# Altium PCB PCB_国产飞控 led端子 copy copy.pcbdoc (part 2 of 2)
Units mil, origin at the board's own origin, x right, y up, seen from the top; angles counter-clockwise.
Board outline 3467.18 x 2997.13 mil, 4 copper layers (Top Layer, Inner1, Inner2, Bottom Layer), stack 2.757 mil thick; 107 components, 163 nets, 527 pads, 148 vias.
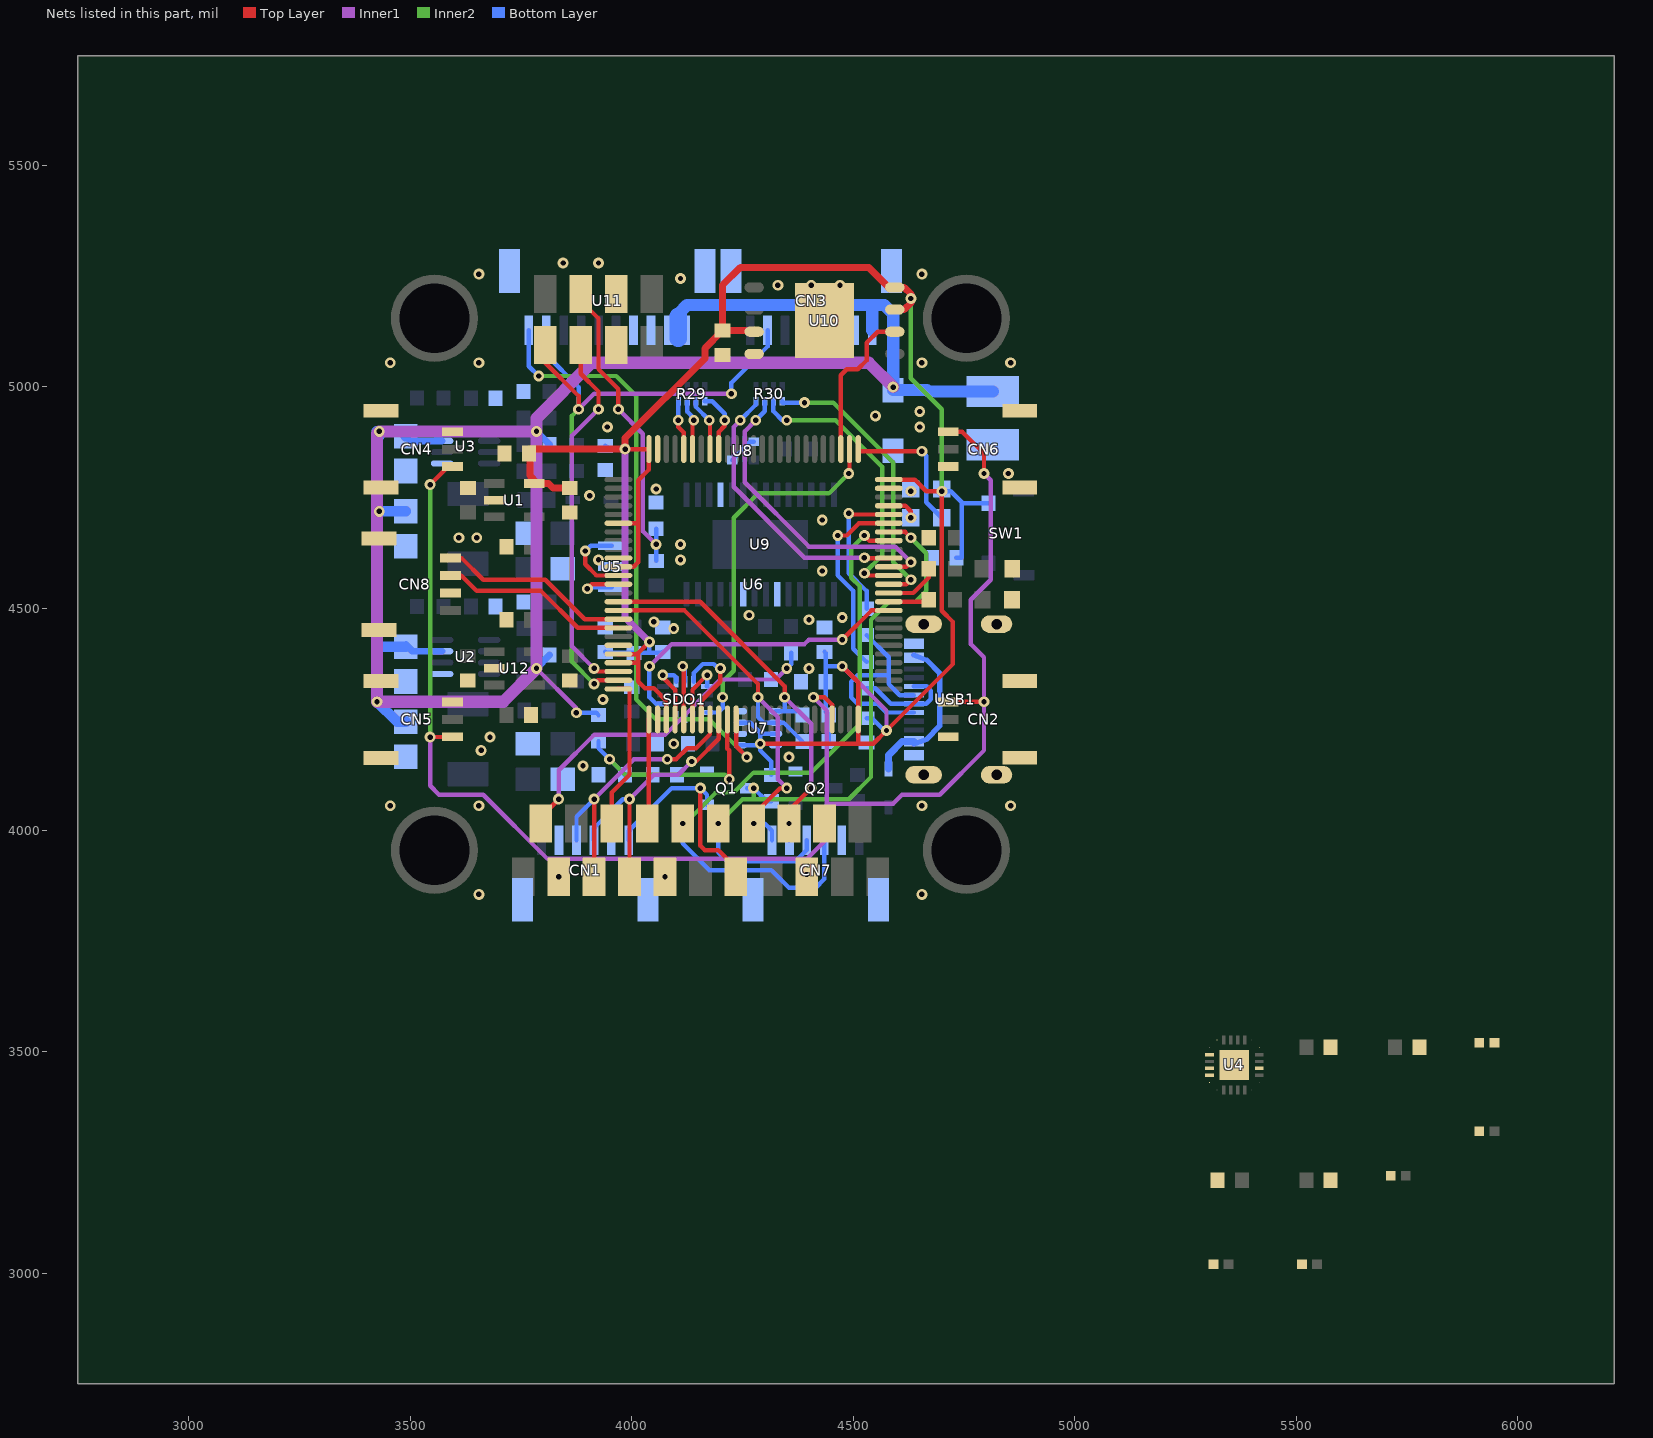
[diagram p4: the nets of this part, all layers, seen from the top]

## Via types
v1: diameter 24.41, hole 12.2, Top Layer to Bottom Layer, 148 vias

## Nets (pads, with @x,y where several pads share a name; then routed paths per layer and width w, separated by ;. In a path a pad name is that pad's centre, name@x,y a point inside that pad or via, vN(x,y) a via of type N, cw(c..) or ccw(c..) an arc to the next point about the centre after c; other vN are vias at no path point) (continued)
BOX_SCK: U6.78 U10.6 | length 352.8
  Top Layer w10: U6.78@4471.9,4859.73 4471.9,5026.53 4485,5039.63 4510,5039.63 4530,5059.63 4530,5099.63 4555,5124.63 U10.6@4593.77,5124.63
C6_1: 
C26_2: 
C27_1: 
C27_2: 
CURRENT1: U6.36 U11.1 | length 1434.8
  Top Layer w10: U6.36@4235.63,4249.52 4235.6,4189.03 v1(4260,4164.63)
  Inner2 w10: v1(3790,5024.63) 3965,5024.63 4010,4979.63 4010,4294.63 4055,4249.63 4175,4249.63 v1(4260,4164.63)
  Bottom Layer w10: U11.1@3767.82,5127.7 3767.8,5046.83 v1(3790,5024.63)
D+: R6.2 U6.71 | length 323
  Top Layer w10: v1(4490,4714.63) 4492.5,4712.13 U6.71@4580.11,4712.11
  Bottom Layer w10: v1(4490,4714.63) 4490,4579.63 4530,4539.63 R6.2@4530,4499.3
D-: R5.2 U6.70 | length 438.8
  Top Layer w10: v1(4465,4664.63) 4485,4664.63 4512.8,4692.43 U6.70@4580.11,4692.43
  Bottom Layer w10: v1(4465,4664.63) 4465,4574.63 4500,4539.63 4500,4409.33 R5.2@4530,4379.3
DN: R5.1 USB1.A7 USB1.B7 | length 225.7
  Bottom Layer w10: R5.1@4530,4319.93 4549.7,4319.93 4584.8,4284.83 USB1.A7@4636.59,4284.79 4664.8,4284.83 4675,4295.03 4675,4314.63 4665.5,4324.13 USB1.B7@4636.6,4324.13
DP: R6.1 USB1.A6 USB1.B6 | length 480
  Bottom Layer w10: R6.1@4530,4439.93 4580,4389.93 4580,4329.63 4605.2,4304.43 USB1.A6@4636.6,4304.43 ; 4580,4349.23 4509.6,4349.23 4495,4334.63 4495,4299.63 4510,4284.63 4555,4284.63 4574.5,4265.13 USB1.B6@4636.59,4265.1
GND: C1.1 C2.1 C3.1 C4.1 C7.1 C8.1 C9.1 C10.1 C11.1 C12.1 C13.1 C14.1 C15.1 C16.1 C17.1 C18.1 C19.1 C20.1 C21.1 C22.1 C23.1 C24.1 C25.1 C28.1 C29.1 C30.1 C31.1 C32.1 C33.1 C35.2 C36.2 C37.2 C38.1 C39.2 CN1.2 CN1.5 CN1.7 CN1.8 CN2.1 CN2.4 CN2.5 CN3.7 CN3.9 CN3.10 CN4.1 CN4.4 CN4.5 CN5.1 CN5.4 CN5.5 CN6.1 CN6.4 CN6.5 CN7.2 CN7.7 CN7.8 CN8.3 CN8.5 CN8.6 D3.2 LED1.2 LED2.2 pad.5@3835,3894.63 pad.5@3965,5094.63 pad.5@3965,5209.63 pad.5@4075,3894.63 pad.5@4435,4014.63 pad.5@4630,4769.63 pad.5@4815,4869.63 Q1.2 Q2.2 R13.1 R14.1 R16.1 R17.2 R20.1 R22.1 R32.1 R33.1 SDO1.6 SDO1.7 U1.2 U2.5 U3.5 U4.18 U4.20 U4.25 U5.2 U6.10 U6.20 U6.27 U6.74 U6.99 U7.1 U7.5 U7.7 U8.2 U8.4 U9.4 U9.20 U9.23 U10.4 U10.9 U11.7 U11.8 U11.11 U11.12 U12.2 USB1.25 USB1.26 USB1.27 USB1.28 USB1.A1 USB1.A12 USB1.B1 USB1.B12 | length 66.4
  Bottom Layer w10: U8.4@4226.38,4834.94 4267.7,4876.33 U8.2@4275.59,4876.28
  other v1: 3655,3854.63 4655,3854.63 3835,3894.63 4075,3894.63 3455,4054.63 3655,4054.63 4655,4054.63 4855,4054.63 3890,4144.63 4355,4164.63 3660,4179.63 4095,4194.63 3680,4209.63 3935,4294.63 4400,4364.63 4095,4454.63 4050,4469.63 4400,4474.63 4475,4479.63 4265,4484.63 4430,4584.63 3925,4609.63 4110,4609.63 4110,4644.63 3610,4659.63 3650,4659.63 4430,4699.63 3905,4754.63 4630,4764.63 4055,4769.63 4850,4804.63 3945,4909.63 4650,4909.63 4550,4934.63 4650,4944.63 3455,5054.63 3655,5054.63 4655,5054.63 4855,5054.63 4330,5229.63 4405,5229.63 4470,5229.63 4110,5244.63 3655,5254.63 4655,5254.63 3845,5279.63 3925,5279.63
GYRO_CS1: R36.1 SDO1.12 U4.22 U6.29 | length 153.9
  Top Layer w10: v1(4070,4349.63) 4070,4344.63 4097.8,4316.83 U6.29@4097.83,4249.52
  Bottom Layer w10: v1(4070,4349.63) 4095,4349.63 4100.3,4344.33 SDO1.12@4100.31,4334.49
GYRO_EXTI1: SDO1.4 U4.12 U6.77 | length 837.6
  Top Layer w10: v1(4490,4804.63) 4491.5,4804.63 U6.77@4491.54,4859.74
  Inner2 w10: v1(4205,4299.63) 4205,4334.63 4230,4359.63 4230,4704.63 4285,4759.63 4445,4759.63 v1(4490,4804.63)
  Bottom Layer w10: SDO1.4@4169.69,4265.1 4195.5,4265.13 4205,4274.63 v1(4205,4299.63)
GYRO_EXTI2: SDO1.9 U6.60 | length 698.7
  Top Layer w10: v1(4475,4429.63) 4540.9,4495.53 U6.60@4580.1,4495.53
  Inner1 w10: v1(4040,4369.63) 4090,4419.63 4390,4419.63 4400,4429.63 v1(4475,4429.63)
  Bottom Layer w10: v1(4040,4369.63) 4040,4299.63 4054.8,4284.83 SDO1.9@4070.32,4284.79
GYRO_MISO: R33.2 SDO1.1 U4.9 U6.31 | length 139.3
  Top Layer w10: U6.31@4137.2,4249.52 4137.2,4316.83 v1(4170,4349.63)
  Bottom Layer w10: SDO1.1@4169.7,4324.13 4170,4324.43 v1(4170,4349.63)
GYRO_MOSI: R34.1 SDO1.14 U4.24 U6.32 | length 225.6
  Top Layer w10: U6.32@4156.89,4249.52 4156.9,4291.53 4200,4334.63 v1(4200,4364.63)
  Bottom Layer w10: SDO1.14@4139.69,4334.49 4139.7,4354.33 4160,4374.63 4185,4374.63 4195,4364.63 v1(4200,4364.63)
GYRO_SCK: R35.1 SDO1.13 U4.23 U6.30 | length 161.2
  Top Layer w10: v1(4115,4369.63) 4117.5,4367.13 U6.30@4117.52,4249.52
  Bottom Layer w10: v1(4115,4369.63) 4120,4369.63 SDO1.13@4120,4334.49
HEXT_IN: U5.3 U6.12 | length 180.4
  Top Layer w10: v1(3895,4629.63) 3895,4599.63 3920.3,4574.33 U6.12@3969.89,4574.31
  Bottom Layer w10: v1(3895,4629.63) 3907.2,4641.83 U5.3@3955,4641.83
HEXT_OUT: U5.1 U6.13 | length 131.8
  Top Layer w10: v1(3900,4544.63) 3910,4554.63 U6.13@3969.89,4554.63
  Bottom Layer w10: v1(3900,4544.63) 3900,4547.43 U5.1@3955,4547.43
I2C_SCL: CN7.5 pad.5@4355,4014.63 R24.1 U6.15 U7.4 | length 945.5
  Top Layer w10: U6.15@3969.9,4515.23 4154.4,4515.23 4345,4324.63 v1(4345,4299.63) ; v1(4355,4014.63) 4355,4044.63 v1(4405,4094.63)
  Inner1 w10: v1(4345,4299.63) 4405,4239.63 v1(4405,4094.63)
  Bottom Layer w10: U7.4@4324.7,4268.02 4377,4268.03 R24.1@4385.34,4259.63 ; v1(4345,4299.63) 4345,4273.03 4350,4268.03 ; v1(4355,4014.63) CN7.5@4355.9,3976.53
I2C_SDA: CN7.6 pad.5@4275,4014.63 R25.1 U6.16 U7.3 | length 1003.7
  Top Layer w10: U6.16@3969.9,4495.53 4119.1,4495.53 4285,4329.63 v1(4285,4299.63) ; v1(4275,4014.63) 4275,4034.63 4335,4094.63 v1(4350,4094.63)
  Inner1 w10: v1(4285,4299.63) 4330,4254.63 4330,4114.63 v1(4350,4094.63)
  Bottom Layer w10: v1(4275,4014.63) 4300,4014.63 4316.6,3998.03 CN7.6@4316.6,3976.53 ; v1(4285,4299.63) 4285,4254.63 4297.2,4242.43 U7.3@4324.7,4242.43 4342.5,4242.43 R25.1@4385.34,4199.63
L1_1: 
LED: CN2.3 CN4.3 CN5.3 CN6.3 pad.5@4395,3894.63 U6.47 | length 3563.7
  Top Layer w10: v1(3545,4209.63) CN5.3@3595.7,4210.23 ; v1(3545,4779.63) 3585.6,4820.23 CN4.3@3595.7,4820.23 ; pad.5@4395,3894.63 v1(4395,3899.63) ; v1(4410,4299.63) 4435,4299.63 4452.2,4282.43 U6.47@4452.17,4249.52 ; CN2.3@4714.29,4289 v1(4795,4289.63) ; CN6.3@4714.29,4899 4745.6,4899.03 4795,4849.63 v1(4795,4804.63)
  Inner1 w10: v1(3545,4209.63) 3545,4099.63 3565,4079.63 3665,4079.63 3810,3934.63 4395,3934.63 ; v1(4410,4299.63) 4440,4269.63 4440,3979.63 4395,3934.63 ; 4440,4059.63 4590,4059.63 4610,4079.63 4695,4079.63 4795,4179.63 v1(4795,4289.63) 4795,4389.63 4765,4419.63 4765,4519.63 4810,4564.63 4810,4789.63 v1(4795,4804.63) ; 4395,3934.63 v1(4395,3899.63) 4395,3934.63
  Inner2 w10: v1(3545,4209.63) v1(3545,4779.63)
LED1: R27.2 U6.61 | length 92
  Top Layer w10: U6.61@4580.1,4515.23 4665.9,4515.23 R27.2@4670.34,4519.63
LED2: R28.2 U6.62 | length 124.4
  Top Layer w10: U6.62@4580.11,4534.94 4635.3,4534.93 4670.3,4569.93 R28.2@4670.34,4589.63
MOTOR1: R29.4 U6.92 | length 142.7
  Top Layer w10: U6.92@4196.26,4859.74 4196.3,4898.33 4210,4912.13 v1(4210,4924.63)
  Bottom Layer w10: R29.4@4164.53,4967.8 4181.8,4967.83 4210,4939.63 v1(4210,4924.63)
MOTOR2: R29.3 U6.93 | length 122.2
  Top Layer w10: v1(4175,4924.63) 4176.6,4924.63 U6.93@4176.57,4859.74
  Bottom Layer w10: R29.3@4144.84,4967.8 4144.8,4954.83 v1(4175,4924.63)
MOTOR3: R29.2 U6.95 | length 117
  Top Layer w10: U6.95@4137.2,4859.74 4137.2,4924.63 v1(4140,4924.63)
  Bottom Layer w10: R29.2@4125.16,4967.8 4125.2,4944.43 4140,4929.63 v1(4140,4924.63)
MOTOR4: R29.1 U6.96 | length 113.5
  Top Layer w10: v1(4105,4924.63) 4105,4909.63 4117.5,4897.13 U6.96@4117.52,4859.74
  Bottom Layer w10: v1(4105,4924.63) 4105,4967.33 R29.1@4105.47,4967.8
OSD_IN_CAM: C34.2 pad.5@3885,5209.63 R22.2 | length 708.1
  Top Layer w10: pad.5@3885,5209.63 3885,5194.63 3925,5154.63 3925,5039.63 3970,4994.63 v1(3970,4949.63)
  Inner1 w10: v1(3970,4949.63) 4025,4894.63 4025,4674.63 v1(4055,4644.63)
  Bottom Layer w10: C34.2@4055,4607.19 v1(4055,4644.63) R22.2@4055,4679.93
OSD_OUT_VTX: pad.5@3795,4014.63 R19.2 | length 785.9
  Top Layer w10: pad.5@3795,4014.63 3795,4029.63 v1(3835,4069.63)
  Inner1 w10: v1(3835,4069.63) 3835,4134.63 3915,4214.63 4075,4214.63 4200,4339.63 4325,4339.63 v1(4350,4364.63)
  Bottom Layer w10: v1(4350,4364.63) 4359.7,4374.33 R19.2@4359.66,4399.63
Q2_1: 
R1_1: 
R1_2: 
R3_1: 
R7_1: 
R7_2: 
R8_1: 
R11_2: 
R12_2: 
R13_2: 
R27_1: 
R28_1: 
R29_5: 
R29_6: 
R29_7: 
R29_8: 
R30_5: 
R30_6: 
R30_7: 
R30_8: 
S$147824: 
S$244950: 
S$244954: 
S$288220: 
S$288224: 
S$288228: 
S$288280: 
S$288284: 
S$288288: 
S$288292: 
SBUS: CN1.1 pad.5@4235,3894.63 Q1.1 | length 517.4
  Top Layer w10: v1(4155,4094.63) 4155,3964.63 4165,3954.63 4195,3954.63 4235,3914.63 pad.5@4235,3894.63
  Bottom Layer w10: CN1.1@3993.4,3976.53 3993.4,3998.03 4090,4094.63 v1(4155,4094.63) 4169.8,4079.83 Q1.1@4169.8,4057.23
SERVO1: R30.4 U6.63 | length 645.2
  Top Layer w10: U6.63@4580.11,4554.63 4620,4554.63 v1(4630,4564.63)
  Inner2 w10: v1(4390,4964.63) 4455,4964.63 4590,4829.63 4590,4604.63 v1(4630,4564.63)
  Bottom Layer w10: R30.4@4339.53,4967.8 4339.5,4964.63 v1(4390,4964.63)
SERVO2: R30.3 U6.64 | length 633.9
  Top Layer w10: v1(4525,4579.63) 4530.3,4574.33 U6.64@4580.11,4574.31
  Inner2 w10: v1(4350,4924.63) 4460,4924.63 4565,4819.63 4565,4619.63 v1(4525,4579.63)
  Bottom Layer w10: R30.3@4319.84,4967.8 4319.8,4944.83 4340,4924.63 v1(4350,4924.63)
SERVO3: R30.2 U6.65 | length 705.8
  Top Layer w10: U6.65@4580.11,4594 4619.4,4594.03 v1(4630,4604.63)
  Inner1 w10: v1(4280,4924.63) 4255,4899.63 4255,4784.63 4400,4639.63 4595,4639.63 v1(4630,4604.63)
  Bottom Layer w10: v1(4280,4924.63) 4300.2,4944.83 R30.2@4300.16,4967.8
SERVO4: R30.1 U6.66 | length 630.9
  Top Layer w10: v1(4525,4614.63) 4525.9,4613.73 U6.66@4580.11,4613.69
  Inner1 w10: v1(4245,4924.63) 4230,4909.63 4230,4774.63 4390,4614.63 v1(4525,4614.63)
  Bottom Layer w10: v1(4245,4924.63) 4280.5,4960.13 R30.1@4280.47,4967.8
SWDCLK: pad.5@4700,4704.63 U6.76 | length 317.5
  Top Layer w10: U6.76@4511.22,4859.74 4511.2,4854.63 v1(4655,4854.63)
  Bottom Layer w10: v1(4655,4854.63) 4665,4844.63 4665,4739.63 pad.5@4700,4704.63
SWDIO: pad.5@4630,4704.63 U6.72 | length 70
  Top Layer w10: U6.72@4580.11,4731.8 4617.8,4731.83 4630,4719.63 v1(4630,4704.63)
U3_1: 
U3_2: 
U3_3: 
U3_4: 
U3_6: 
U3_8: 
U6_14: 
U6_37: 
U9_5: 
U9_6: 
U9_19: 
U9_22: 
UART1_RX: CN7.4 pad.5@4195,4014.63 Q1.3 R26.1 U6.69 | length 1483
  Top Layer w10: U6.69@4580.11,4672.74 4616.9,4672.73 v1(4630,4659.63)
  Inner2 w10: v1(4195,4014.63) 4250,4069.63 4490,4069.63 4540,4119.63 4540,4474.63 4580,4514.63 4640,4514.63 4665,4539.63 4665,4624.63 v1(4630,4659.63) ; 4275,4069.63 v1(4275,4094.63)
  Bottom Layer w10: v1(4195,4014.63) 4195,3949.63 4215,3929.63 4370,3929.63 4395.3,3954.93 CN7.4@4395.3,3976.53 ; Q1.3@4260.2,4094.63 v1(4275,4094.63) 4304.7,4064.93 R26.1@4315,4064.93
UART1_TX: CN7.3 pad.5@4115,4014.63 U6.68 | length 1500.3
  Top Layer w10: v1(4525,4664.63) 4536.6,4653.03 U6.68@4580.1,4653.03
  Inner2 w10: v1(4115,4014.63) 4120,4014.63 4190,4084.63 4230,4084.63 4275,4129.63 4405,4129.63 4515,4239.63 4515,4549.63 4495,4569.63 4495,4634.63 v1(4525,4664.63)
  Bottom Layer w10: v1(4115,4014.63) 4115,3969.63 4175,3909.63 4315,3909.63 4355,3869.63 4415,3869.63 4434.7,3889.33 CN7.3@4434.7,3976.53
UART2_RX: pad.5@4035,4014.63 U6.26 | length 238.7
  Top Layer w10: pad.5@4035,4014.63 4038.8,4014.63 U6.26@4038.78,4249.52
UART2_TX: pad.5@3955,4014.63 U6.25 | length 345.5
  Top Layer w10: pad.5@3955,4014.63 3955,4084.63 3995,4124.63 3995,4318.43 U6.25@3969.89,4318.41
UART3_RX: CN1.3 pad.5@3995,3894.63 U6.34 | length 611.5
  Top Layer w10: pad.5@3995,3894.63 3995,3954.63 v1(3995,4069.63) ; v1(4135,4154.63) 4145,4154.63 4196.3,4205.93 U6.34@4196.26,4249.52
  Inner1 w10: v1(3995,4069.63) 4050,4124.63 4105,4124.63 v1(4135,4154.63)
  Bottom Layer w10: CN1.3@3914.7,3976.53 3914.7,4004.33 3980,4069.63 v1(3995,4069.63)
UART3_TX: CN1.4 pad.5@3915,3894.63 U6.33 | length 640.2
  Top Layer w10: pad.5@3915,3894.63 3915,3959.63 v1(3915,4069.63) ; v1(4080,4159.63) 4100,4159.63 4125,4184.63 4145,4184.63 4176.6,4216.23 U6.33@4176.57,4249.52
  Inner1 w10: v1(3915,4069.63) 4005,4159.63 v1(4080,4159.63)
  Bottom Layer w10: CN1.4@3875.3,3976.53 3875.3,4029.93 v1(3915,4069.63)
UART4_RX: CN3.2 pad.5@3805,5094.63 U6.24 U11.2 | length 1626.1
  Top Layer w10: pad.5@3805,5094.63 3805,5054.63 3880,4979.63 v1(3880,4949.63) ; v1(3915,4329.63) 3923.5,4338.13 U6.24@3969.89,4338.09
  Inner1 w10: v1(3880,4949.63) 3915,4984.63 v1(4225,4984.63)
  Inner2 w10: v1(3880,4949.63) 3865,4934.63 3865,4379.63 v1(3915,4329.63)
  Bottom Layer w10: U11.2@3807.19,5127.7 3807.2,5072.43 3880,4999.63 v1(3880,4949.63) ; v1(4225,4984.63) 4225,5009.63 4306.6,5091.23 CN3.2@4306.59,5127.7
UART4_TX: pad.5@3885,5094.63 U6.23 | length 849.9
  Top Layer w10: pad.5@3885,5094.63 3885,5029.63 3925,4989.63 v1(3925,4949.63) ; v1(3915,4364.63) 3921.9,4357.73 U6.23@3969.9,4357.73
  Inner1 w10: v1(3915,4364.63) 3865,4414.63 3865,4889.63 v1(3925,4949.63)
UART8_RX: CN8.2 U6.18 | length 428.1
  Top Layer w10: CN8.2@3590.71,4574.32 3615.3,4574.33 3650,4539.63 3795,4539.63 3878,4456.63 U6.18@3970,4456.63
UART8_TX: CN8.1 U6.17 | length 436.3
  Top Layer w10: CN8.1@3590.71,4613.69 3615.9,4613.73 3665,4564.63 3805,4564.63 3893.7,4475.93 U6.17@3969.89,4475.89
VBAT: C7.2 C8.2 C12.2 C13.2 CN3.8 D3.1 pad.5@4815,4989.63 R3.2 R4.2 R15.2 U2.7 U3.7 U11.9 U11.10 | length 5190.9
  Inner1 w10: v1(3785,4364.63) 3875,4274.63 v1(3875,4264.63)
  Inner1 w27.56: v1(4590,4999.63) 4535,5054.63 3909,5054.63 3784.8,4929.13 v1(3785,4899.63) ; v1(3785,4899.63) v1(3430,4899.63) 3425,4894.63 v1(3425,4289.63) 3710,4289.63 v1(3785,4364.63) v1(3785,4899.63)
  Bottom Layer w10: v1(3875,4264.63) 3919.7,4264.63 R15.2@3925,4259.3
  Bottom Layer w15.75: C7.2@3490,4419.03 3505.6,4403.43 U2.7@3572,4403.43 ; C12.2@3490,4889 3500.6,4878.43 U3.7@3572,4878.43 ; v1(3785,4364.63) R3.2@3814.66,4394.63 ; v1(3785,4899.63) R4.2@3814.66,4869.63
  Bottom Layer w23.62: v1(3430,4719.03) C13.2@3490,4719 ; v1@3430,4889.03 v1(3430,4899.63) ; 3435,4414.03 C7.2@3490,4414 ; C8.2@3490,4244 3470.6,4244.03 v1(3425,4289.63) 3425,4899.63 3490,4899.63 C12.2@3490,4889
  Bottom Layer w27.56: 4105,5127.73 4105,5164.63 4125,5184.63 4542.8,5184.63 ; CN3.8@4542.81,5127.7 4542.8,5184.63 ; pad.5@4815,4989.63 4670,4989.63 4666.7,4992.93 D3.1@4589.99,4992.94 4590,5164.63 4570,5184.63 4542.8,5184.63
  Bottom Layer w39.37: 4105,5109.32 4105,5159.94
VBAT_ADC: C22.2 R15.1 R16.2 U6.35 | length 594.9
  Top Layer w10: U6.35@4215.94,4249.52 4215.9,4183.73 4220,4179.63 v1(4220,4114.63)
  Inner2 w10: v1(3950,4159.63) 3985,4124.63 4210,4124.63 v1(4220,4114.63)
  Bottom Layer w10: R15.1@3925,4199.93 3925,4184.33 R16.2@3984.66,4124.63 C22.2@4047.45,4124.63 ; v1(3950,4159.63) 3950,4159.33 v1@3954.7,4154.63
VBUS: D1.1 USB1.A4 USB1.A9 USB1.B4 USB1.B9 | length 366
  Bottom Layer w11.81: USB1.A9@4636.59,4194.24 4665,4204.63 4695,4234.63 4695,4354.63 4666.4,4383.23 USB1.A4@4636.59,4395.02
  Bottom Layer w15.75: D1.1@4580,4137.84 4580,4169.63 4610,4199.63 USB1.A9@4636.6,4199.63
VDD: C19.2 C20.2 C25.2 C28.2 C29.2 C30.2 C31.2 C32.2 C33.2 C35.1 pad.5@4700,4769.63 R18.2 R24.2 R25.2 R26.2 SW1.2 U1.5 U6.6 U6.11 U6.21 U6.22 U6.28 U6.50 U6.75 U6.100 U7.2 U7.6 U7.8 U10.3 U10.7 U10.8 | length 5516.6
  Top Layer w10: U6.22@3969.9,4377.43 4015,4377.43 ; U6.21@3969.9,4397.13 4012.5,4397.13 v1(4040,4424.63) ; U6.11@3969.89,4594 4004.4,4594.03 4015,4604.63 4015,4692.43 4015,4789.63 4038.8,4813.43 U6.100@4038.78,4859.74 3985.1,4859.73 v1(3985,4859.63) ; 4015,4399.63 4015,4377.43 ; U6.28@4078.1,4249.53 4078.1,4291.53 4050,4319.63 4030,4319.63 4015,4334.63 4015,4377.43 ; v1(4290,4194.63) 4545,4194.63 v1(4575,4224.63) 4725,4374.63 4725,4469.63 4700,4494.63 v1(4700,4764.63) 4665,4764.63 4638.8,4790.83 U6.75@4580.11,4790.85 ; v1(4475,4369.63) 4511.2,4333.43 U6.50@4511.22,4249.52 4511.2,4199.63
  Top Layer w10.08: U6.6@3969.89,4692.43 4015,4692.43
  Top Layer w15.75: C19.2@3767.86,4849.63 3767.9,4859.63 v1(3985,4859.63) 3985,4884.63 4165,5064.63 4165,5087.23 C35.1@4205,5127.19 ; C19.2@3770,4849.63 3770,4799.63 3787.6,4782.03 3796.2,4782.03 3812.6,4782.03 3822.4,4772.23 C20.2@3850,4772.23 ; U10.3@4276.23,5124.63 4273.6,5127.23 C35.1@4205,5127.19 ; U10.7@4593.77,5174.63 4615,5174.63 4630,5189.63 v1(4630,5199.63) 4630,5209.63 4615,5224.63 U10.8@4593.77,5224.63 4580,5224.63 4535,5269.63 4245,5269.63 4205,5229.63 C35.1@4205,5127.19
  Inner1 w10: v1(4475,4369.63) 4575,4269.63 v1(4575,4224.63)
  Inner1 w15.75: v1(3985,4859.63) 3985,4479.63 v1(4040,4424.63)
  Inner2 w10: v1(4630,5199.63) 4630,5019.63 4700,4949.63 v1(4700,4764.63)
  Bottom Layer w10: C30.2@3940,4402.03 3942.1,4399.93 4005,4399.93 4067.9,4399.93 C32.2@4070,4402.03 ; C28.2@3940,4867.19 3947.6,4859.63 v1(3985,4859.63) ; 4040,4399.97 v1(4040,4424.63) ; U7.8@4245.29,4191.24 4286.6,4191.23 v1(4290,4194.63) ; U7.6@4245.29,4242.43 4267.2,4242.43 4290,4219.63 v1(4290,4194.63) ; 4290,4216.83 U7.2@4324.7,4216.84 ; R26.2@4315,4124.3 4315,4154.63 4290,4179.63 v1(4290,4194.63) ; C29.2@4435,4402.03 4437.6,4399.53 4437.6,4369.73 ; R25.2@4444.66,4199.63 R24.2@4444.66,4259.63 4437.6,4266.73 C31.2@4437.56,4334.63 4437.6,4369.73 ; v1(4475,4369.63) 4437.7,4369.63 4437.6,4369.73 ; C25.2@4530,4252.19 4542.4,4252.23 4570,4224.63 v1(4575,4224.63) ; pad.5@4700,4769.63 v1(4700,4764.63) ; C33.2@4732.56,4614.63 4745,4614.63 4745,4739.63 ; SW1.2@4805.11,4737.81 4746.8,4737.83 4745,4739.63 ; v1(4700,4764.63) 4720,4764.63 ; v1(4700,4764.63) 4720,4764.63 ; 4720,4764.63 4745,4739.63
pads on no net: CN3.1 SDO1.2 SDO1.3 SDO1.10 SDO1.11 SW1.3 SW1.4 U1.4 U6.1 U6.2 U6.3 U6.4 U6.5 U6.7 U6.8 U6.9 U6.19 U6.38 U6.39 U6.40 U6.41 U6.42 U6.43 U6.44 U6.45 U6.46 U6.49 U6.51 U6.52 U6.53 U6.54 U6.55 U6.56 U6.57 U6.58 U6.59 U6.67 U6.73 U6.81 U6.83 U6.88 U6.89 U6.90 U6.91 U6.97 U6.98 U9.1 U9.2 U9.7 U9.12 U9.13 U9.14 U9.15 U9.16 U9.17 U9.18 U9.27 U9.28 U9.29 U12.4 USB1.A5 USB1.A8 USB1.B5 USB1.B8

## Polygon pours and split planes (outlines as drawn)
GND on Bottom Layer "Bottom Layer-GND" (solid, pour order 14): 3007.5,5482.13 3007.5,3587.13 3032.5,3562.13 5152.5,3562.13 5152.5,5462.13 5132.5,5482.13 5267.5,5482.13 5282.5,5497.13
GND on Inner2 "Inner2-GND" (solid, pour order 15): 3025,5469.63 3025,3559.63 3020,3554.63 5150,3554.63 5150,5434.63 5095,5489.63
GND on Inner1 "Inner1-GND" (solid, pour order 16): 3000,5492.13 3000,3597.13 3040,3557.13 5085,3557.13 5145,3617.13 5145,5467.13 5150,5472.13
GND on Top Layer "Top Layer-GND" (solid, pour order 4): 3030,5457.13 3030,3557.13 3040,3547.13 5110,3547.13 5130,3567.13 5130,5447.13 5125,5452.13

## Keep-outs
Board Outline Layer:
  region: 3534.12,5133.75 3334.12,5333.75 3331.4,5336.51 3327.57,5343.23 3325.6,5350.72 3325.62,5358.46 3327.64,5365.93 3331.52,5372.64 3336.99,5378.11 3343.7,5381.99 3351.17,5384.01 3358.91,5384.03 3366.4,5382.06 3373.12,5378.23 3375.88,5375.51 3575.88,5175.51 3578.6,5172.75 3582.43,5166.03 3584.4,5158.54 3584.38,5150.8 3582.36,5143.33 3578.48,5136.62 3573.01,5131.15 3566.3,5127.27 3558.83,5125.25 3551.09,5125.23 3543.6,5127.2 3536.88,5131.03 3534.12,5133.75
  region: 3534.12,5133.75 3334.12,5333.75 3331.4,5336.51 3327.57,5343.23 3325.6,5350.72 3325.62,5358.46 3327.64,5365.93 3331.52,5372.64 3336.99,5378.11 3343.7,5381.99 3351.17,5384.01 3358.91,5384.03 3366.4,5382.06 3373.12,5378.23 3375.88,5375.51 3575.88,5175.51 3578.6,5172.75 3582.43,5166.03 3584.4,5158.54 3584.38,5150.8 3582.36,5143.33 3578.48,5136.62 3573.01,5131.15 3566.3,5127.27 3558.83,5125.25 3551.09,5125.23 3543.6,5127.2 3536.88,5131.03 3534.12,5133.75
  region: 4734.12,5175.51 4934.12,5375.51 4936.88,5378.23 4943.6,5382.06 4951.09,5384.03 4958.83,5384.01 4966.3,5381.99 4973.01,5378.11 4978.48,5372.64 4982.36,5365.93 4984.38,5358.46 4984.4,5350.72 4982.43,5343.23 4978.6,5336.51 4975.88,5333.75 4775.88,5133.75 4773.12,5131.03 4766.4,5127.2 4758.91,5125.23 4751.17,5125.25 4743.7,5127.27 4736.99,5131.15 4731.52,5136.62 4727.64,5143.33 4725.62,5150.8 4725.6,5158.54 4727.57,5166.03 4731.4,5172.75 4734.12,5175.51
  region: 4734.12,5175.51 4934.12,5375.51 4936.88,5378.23 4943.6,5382.06 4951.09,5384.03 4958.83,5384.01 4966.3,5381.99 4973.01,5378.11 4978.48,5372.64 4982.36,5365.93 4984.38,5358.46 4984.4,5350.72 4982.43,5343.23 4978.6,5336.51 4975.88,5333.75 4775.88,5133.75 4773.12,5131.03 4766.4,5127.2 4758.91,5125.23 4751.17,5125.25 4743.7,5127.27 4736.99,5131.15 4731.52,5136.62 4727.64,5143.33 4725.62,5150.8 4725.6,5158.54 4727.57,5166.03 4731.4,5172.75 4734.12,5175.51
  region: 4775.88,3975.51 4970.88,3780.51 4973.6,3777.75 4977.43,3771.03 4979.4,3763.54 4979.38,3755.8 4977.36,3748.33 4973.48,3741.62 4968.01,3736.15 4961.3,3732.27 4953.83,3730.25 4946.09,3730.23 4938.6,3732.2 4931.88,3736.03 4929.12,3738.75 4734.12,3933.75 4731.4,3936.51 4727.57,3943.23 4725.6,3950.72 4725.62,3958.46 4727.64,3965.93 4731.52,3972.64 4736.99,3978.11 4743.7,3981.99 4751.17,3984.01 4758.91,3984.03 4766.4,3982.06 4773.12,3978.23 4775.88,3975.51
  region: 4775.88,3975.51 4970.88,3780.51 4973.6,3777.75 4977.43,3771.03 4979.4,3763.54 4979.38,3755.8 4977.36,3748.33 4973.48,3741.62 4968.01,3736.15 4961.3,3732.27 4953.83,3730.25 4946.09,3730.23 4938.6,3732.2 4931.88,3736.03 4929.12,3738.75 4734.12,3933.75 4731.4,3936.51 4727.57,3943.23 4725.6,3950.72 4725.62,3958.46 4727.64,3965.93 4731.52,3972.64 4736.99,3978.11 4743.7,3981.99 4751.17,3984.01 4758.91,3984.03 4766.4,3982.06 4773.12,3978.23 4775.88,3975.51
  region: 3575.88,3933.75 3380.88,3738.75 3378.12,3736.03 3371.4,3732.2 3363.91,3730.23 3356.17,3730.25 3348.7,3732.27 3341.99,3736.15 3336.52,3741.62 3332.64,3748.33 3330.62,3755.8 3330.6,3763.54 3332.57,3771.03 3336.4,3777.75 3339.12,3780.51 3534.12,3975.51 3536.88,3978.23 3543.6,3982.06 3551.09,3984.03 3558.83,3984.01 3566.3,3981.99 3573.01,3978.11 3578.48,3972.64 3582.36,3965.93 3584.38,3958.46 3584.4,3950.72 3582.43,3943.23 3578.6,3936.51 3575.88,3933.75
  region: 3575.88,3933.75 3380.88,3738.75 3378.12,3736.03 3371.4,3732.2 3363.91,3730.23 3356.17,3730.25 3348.7,3732.27 3341.99,3736.15 3336.52,3741.62 3332.64,3748.33 3330.62,3755.8 3330.6,3763.54 3332.57,3771.03 3336.4,3777.75 3339.12,3780.51 3534.12,3975.51 3536.88,3978.23 3543.6,3982.06 3551.09,3984.03 3558.83,3984.01 3566.3,3981.99 3573.01,3978.11 3578.48,3972.64 3582.36,3965.93 3584.38,3958.46 3584.4,3950.72 3582.43,3943.23 3578.6,3936.51 3575.88,3933.75
  lines w0.1: 3334.12,5333.75 cw(c3355.14,5354.49) 3375.88,5375.51 3575.88,5175.51 cw(c3554.86,5154.77) 3534.12,5133.75 3334.12,5333.75 ; 3339.12,3780.51 ccw(c3360.14,3759.77) 3380.88,3738.75 3575.88,3933.75 ccw(c3554.86,3954.49) 3534.12,3975.51 3339.12,3780.51 ; 4734.12,3933.75 cw(c4755.14,3954.49) 4775.88,3975.51 4970.88,3780.51 cw(c4949.86,3759.77) 4929.12,3738.75 4734.12,3933.75 ; 4734.12,5175.51 ccw(c4755.14,5154.77) 4775.88,5133.75 4975.88,5333.75 ccw(c4954.86,5354.49) 4934.12,5375.51 4734.12,5175.51
  lines w10: 3397.13,3954.24 ccw(c3554.61,3954.24) 3554.61,3796.76 4755.39,3796.76 ccw(c4755.39,3954.24) 4912.87,3954.24 4912.87,5155.02 ccw(c4755.39,5155.02) 4755.39,5312.5 3554.61,5312.5 ccw(c3554.61,5155.02) 3397.13,5155.02 3397.13,3954.24

## Silkscreen, mask and mechanical layers (free items; w line width, h text height)
Top Silkscreen Layer:
  drawing of 33 lines, arcs and shapes, not listed
  text "10V" at 3835,5029.63 h26.77 r180
  text "CAM" at 3925,5029.63 h26.77 r180
  text "GND" at 4005,5029.63 h26.77 r180
  text "5V" at 4065,5029.63 h26.77 r180
  text "R4" at 3825,4979.63 h26.77 r180
  text "T4" at 3910,4979.63 h26.77 r180
  text "GND" at 4005,4979.63 h26.77 r180
  text "5V" at 4065,4979.63 h26.77 r180
  text "SHEEPFINDER" at 4160,4969.63 h59.05
  text "G 5 L" at 3640,4924.63 h26.77 r270
  text "V1.1   2024.1" at 4225,4904.63 h59.05
  text "G 5 L" at 4670,4804.63 h26.77 r90
  text "MCU" at 3730.31,4784.63 h26.77 r270
  text "BOOT" at 4730,4699.63 h31.5
  text "AT32F435" at 4080,4679.63 h78.74
  text "T" at 3630,4624.63 h26.77 r270
  text "U" at 3660,4609.63 h26.77 r270
  text "A" at 3660,4589.63 h26.77 r270
  text "R" at 3629.61,4585.02 h26.77 r270
  text "R" at 3660,4564.63 h26.77 r270
  text "G" at 3629.22,4545.41 h26.77 r270
  text "T" at 3660,4544.63 h26.77 r270
  text "8" at 3660,4524.63 h26.77 r270
  text "5" at 3629.22,4505.41 h26.77 r270
  text "IMU" at 3734.7,4389.63 h26.77 r270
  text "USB" at 4735,4389.63 h31.5
  text "JLCJLCJLCJLC" at 4085,4329.63 h39.37
  text "G 5 L" at 3640,4289.63 h26.77 r270
  text "G 5 L" at 4670,4199.63 h26.77 r90
  text "VTX" at 3760,4129.63 h26.77
  text "5V" at 3855,4129.63 h26.77
  text "T2" at 3925,4129.63 h26.77
  text "R2" at 4005,4129.63 h26.77
  text "T1" at 4085,4129.63 h26.77
  text "R1" at 4160,4129.63 h26.77
  text "SDA" at 4225,4129.63 h26.77
  text "SCL" at 4315,4129.63 h26.77
  text "GND" at 4400,4129.63 h26.77
  text "5V" at 4500,4129.63 h26.77
  text "10V" at 3725,4079.63 h26.77
  text "GND" at 3800,4079.63 h26.77
  text "T3" at 3890,4079.63 h26.77
  text "R3" at 3965,4079.63 h26.77
  text "GND" at 4035,4079.63 h26.77
  text "5V" at 4125,4079.63 h26.77
  text "SBUS" at 4185,4079.63 h26.77
  text "5V" at 4300,4079.63 h26.77
  text "LED" at 4365,4079.63 h26.77
  text "BB-" at 4445,4079.63 h26.77
  text "BB+" at 4535,4079.63 h26.77
Bottom Silkscreen Layer:
  lines w3.94: 4090,3834.63 4140,3834.63 ; 4095,3824.63 4090,3824.63 4080,3834.63 4090,3844.63 4095,3844.63 ; 4170,3914.63 4220,3914.63 ; 4215,3904.63 4220,3904.63 4230,3914.63 4220,3924.63 4215,3924.63 ; 4600,4674.63 4665,4674.63 4675,4684.63 ; 4600,4799.63 4665,4799.63 4675,4789.63 ; 4605,4729.63 4620,4729.63 4625,4724.63 ; 4605,4744.63 4620,4744.63 4625,4749.63
  lines w31.5: 3397.13,3954.24 ccw(c3554.61,3954.24) 3554.61,3796.76 4755.39,3796.76 ccw(c4755.39,3954.24) 4912.87,3954.24 4912.87,5155.02 ccw(c4755.39,5155.02) 4755.39,5312.5 3554.61,5312.5 ccw(c3554.61,5155.02) 3397.13,5155.02 3397.13,3954.24
  text "GND" at 4020,5089.63 h26.77 r90
  text "GND" at 4060,5089.63 h26.77 r90
  text "BAT" at 4100,5089.63 h26.77 r90
  text "BAT" at 4140,5089.63 h26.77 r90
  text "GND" at 4520,5089.63 h26.77 r90
  text "BAT" at 4560,5089.63 h26.77 r90
  text "CC" at 3780,5084.63 h26.77 r90
  text "R4" at 3820,5084.63 h26.77 r90
  text "M4" at 3860,5084.63 h26.77 r90
  text "M3" at 3900,5084.63 h26.77 r90
  text "M2" at 3940,5084.63 h26.77 r90
  text "M1" at 3980,5084.63 h26.77 r90
  text "NC" at 4280,5084.63 h26.77 r90
  text "R4" at 4320,5084.63 h26.77 r90
  text "S4" at 4360,5084.63 h26.77 r90
  text "S3" at 4400,5084.63 h26.77 r90
  text "S2" at 4440,5084.63 h26.77 r90
  text "S1" at 4480,5084.63 h26.77 r90
  text "+" at 4730,4954.63 h70.87
  text "-" at 4735,4899.63 h70.87 r90
  text "3.3" at 4590,4774.63 h26.77
  text "GND" at 4595,4739.63 h26.77
  text "IO" at 4575,4704.63 h26.77
  text "5V" at 3645,4699.63 h26.77 r90
  text "CLK" at 4595,4669.63 h26.77
  text "10V" at 3645,4234.63 h26.77 r90
  text "V" at 3790,4014.63 h26.77
  text "0" at 3805,4014.63 h26.77
  text "1" at 3815,4014.63 h26.77
  text "G" at 3845,4014.63 h26.77
  text "3" at 3875,4014.63 h26.77
  text "T" at 3890,4014.63 h26.77
  text "3" at 3915,4014.63 h26.77
  text "R" at 3930,4014.63 h26.77
  text "G" at 3965,4014.63 h26.77
  text "S" at 3995,4014.63 h26.77
  text "S" at 4015,4014.63 h26.77
  text "D" at 4110,3979.63 h26.77
  text "C" at 4140,3979.63 h26.77
  text "1" at 4160,3979.63 h26.77
  text "R" at 4180,3979.63 h26.77
  text "1" at 4205,3979.63 h26.77
  text "T" at 4225,3979.63 h26.77
  text "G" at 4255,3979.63 h26.77
  text "V" at 4285,3979.63 h26.77
  text "5" at 4300,3979.63 h26.77
  text "GPS" at 4235,3934.63 h26.77
  text "DJI" at 4135,3849.63 h26.77
Mechanical Layer:
  lines w0.1: 3334.12,5333.75 cw(c3355.14,5354.49) 3375.88,5375.51 3575.88,5175.51 cw(c3554.86,5154.77) 3534.12,5133.75 3334.12,5333.75 ; 3339.12,3780.51 ccw(c3360.14,3759.77) 3380.88,3738.75 3575.88,3933.75 ccw(c3554.86,3954.49) 3534.12,3975.51 3339.12,3780.51 ; 4734.12,3933.75 cw(c4755.14,3954.49) 4775.88,3975.51 4970.88,3780.51 cw(c4949.86,3759.77) 4929.12,3738.75 4734.12,3933.75 ; 4734.12,5175.51 ccw(c4755.14,5154.77) 4775.88,5133.75 4975.88,5333.75 ccw(c4954.86,5354.49) 4934.12,5375.51 4734.12,5175.51